# Altium PCB main.PcbDoc (part 15 of 16)
Units mil, origin at the board's own origin, x right, y up, seen from the top; angles counter-clockwise.
Board outline 8394.75 x 5164.44 mil, 7 copper layers (Top Layer 1, Layer 2, Layer 3, Unused, Layer 4_pow, Layer 5_gnd, Bottom 6+gnd), stack 64.043 mil thick; 364 components, 409 nets, 1932 pads, 1061 vias.
Unrouted connection lines stored in the file: 2.
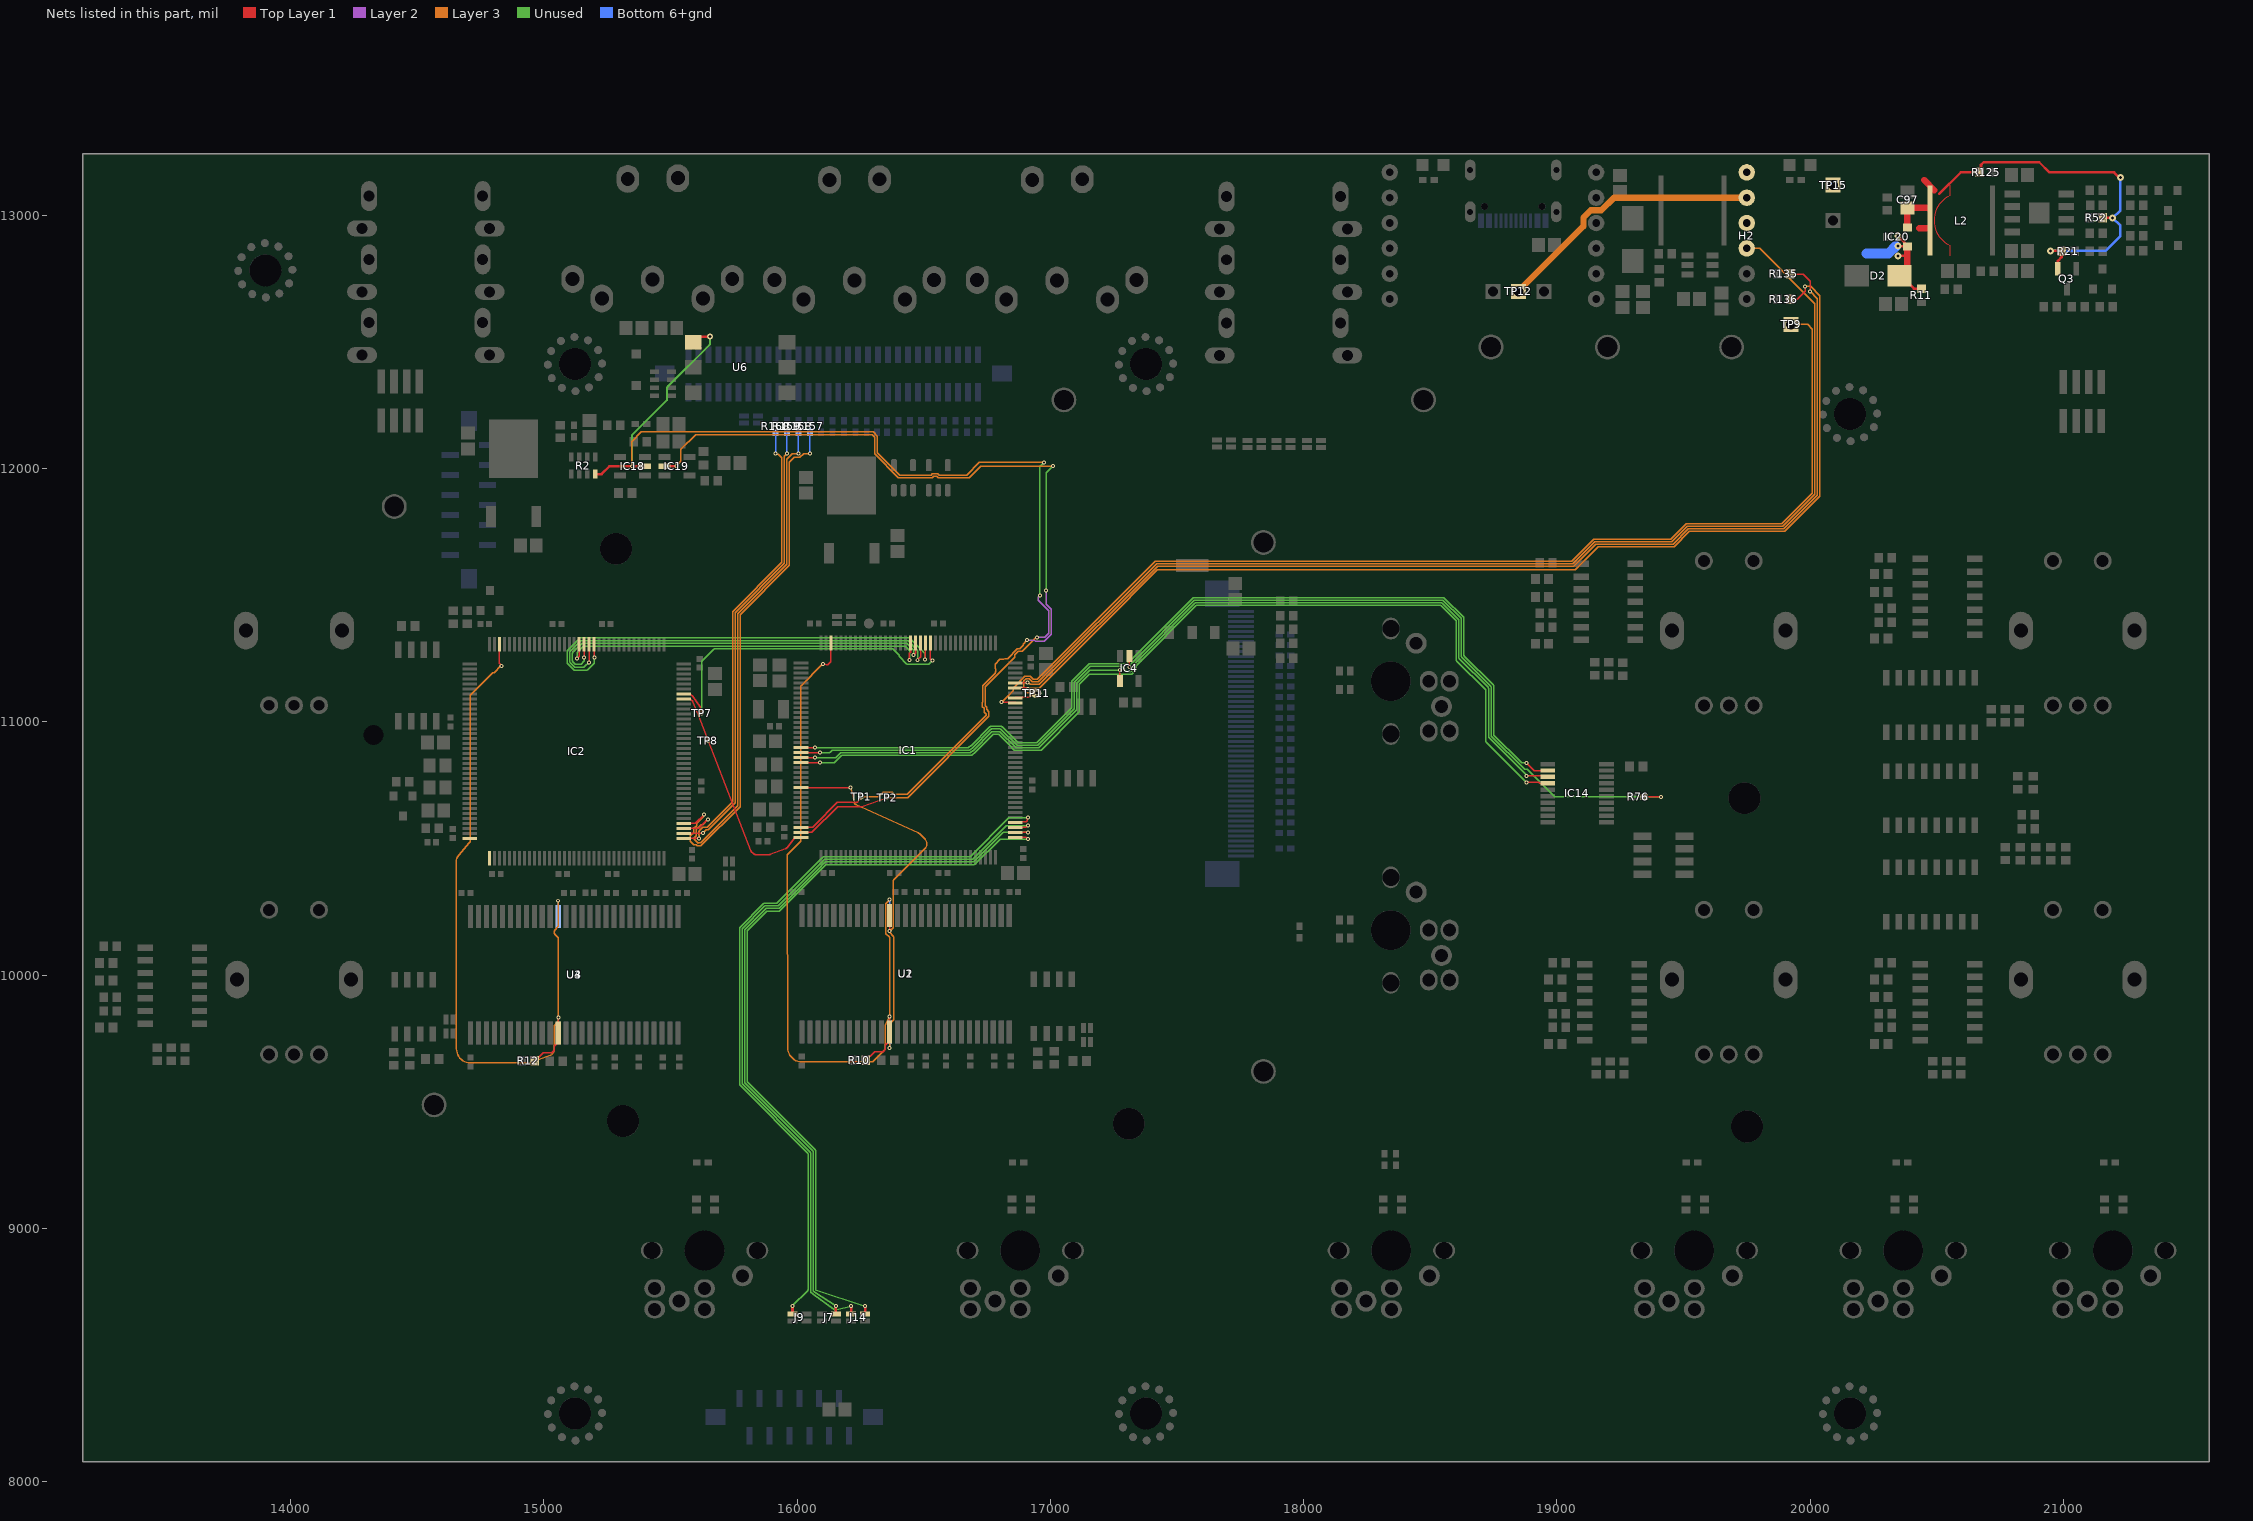
[diagram p18: the nets of this part, all layers, seen from the top]

## Via types
v1: diameter 15.75, hole 7.87, Top Layer 1 to Bottom 6+gnd, tented both sides, 961 vias
v2: diameter 27.56, hole 11.81, Top Layer 1 to Bottom 6+gnd, 45 vias
v3: diameter 23.62/23.62/23.62/23.62/23.62/23.62/23.62 (per signal layer), hole 12, Top Layer 1 to Bottom 6+gnd, tented top, 42 vias
v4: diameter 15.75, hole 7.87, Top Layer 1 to Bottom 6+gnd, 10 vias
v5: diameter 23.62/23.62/23.62/23.62/23.62/23.62/23.62 (per signal layer), hole 12, Top Layer 1 to Bottom 6+gnd, tented bottom, 3 vias

## Nets (pads, with @x,y where several pads share a name; then routed paths per layer and width w, separated by ;. In a path a pad name is that pad's centre, name@x,y a point inside that pad or via, vN(x,y) a via of type N, cw(c..) or ccw(c..) an arc to the next point about the centre after c; other vN are vias at no path point) (continued)
SDNWE_6: IC1.26 U1.16 U2.16 | length 2408.3
  Top Layer 1 w5: IC1.26@16015.39,10741.18 16210.13,10741.2 v1(16211.04,10742.1) ; v1@16365.16,10174.38 U1.16@16365.16,10236.22
  Layer 3 w5: v1(16211.04,10742.1) 16225.31,10683.52 ccw(c16240.24,10687.2) 16233.85,10673.22 16478.29,10561.67 cw(c16467.76,10538.58) 16485.98,10556.24 16505.35,10536.23 ; v1(16364.91,9713.5) 16364.91,9805.11 cw(c16369.91,9805.12) 16366.36,9808.63 16379.58,9821.89 ; v1@16366.14,10168.77 16379.79,10153.23 ; 16380.6,10191.89 16380.6,10374.1 cw(c16385.6,10374.1) 16382.05,10377.62 16505.1,10500.67 ; 16381.03,9825.38 16381.03,10149.97 ; v1@16364.91,10172.06 ccw(c16369.91,10172.06) v1@16366.14,10168.78 ; v1@16364.91,10172.06 ccw(c16369.91,10172.06) v1@16366.14,10168.78 ; v1@16364.91,10172.06 ccw(c16369.91,10172.06) v1@16366.14,10168.78 ; v1@16364.91,10172.06 ccw(c16369.91,10172.06) v1@16366.14,10168.78 ; v1@16364.91,10172.06 ccw(c16369.91,10172.06) v1@16366.14,10168.78 ; v1@16364.91,10172.06 ccw(c16369.91,10172.06) v1@16366.14,10168.78 ; v1@16364.91,10172.06 ccw(c16369.91,10172.06) v1@16366.14,10168.78 ; v1@16364.91,10172.06 ccw(c16369.91,10172.06) v1@16366.14,10168.78 ; v1@16364.91,10172.06 ccw(c16369.91,10172.06) v1@16366.14,10168.78 ; v1@16364.91,10172.06 ccw(c16369.91,10172.06) v1@16366.14,10168.78 ; v1@16364.91,10172.06 ccw(c16369.91,10172.06) v1@16366.14,10168.78 ; v1@16364.91,10172.06 ccw(c16369.91,10172.06) v1@16366.14,10168.78 ; v1@16364.91,10172.06 ccw(c16369.91,10172.06) v1@16366.14,10168.78 ; v1@16364.91,10172.06 ccw(c16369.91,10172.06) v1@16366.14,10168.78 ; v1@16364.91,10172.06 ccw(c16369.91,10172.06) v1@16366.14,10168.78 ; v1@16364.91,10172.06 ccw(c16369.91,10172.06) v1@16366.14,10168.78 ; v1@16364.91,10172.06 v1(16364.91,10174.13) 16379.14,10188.41 ; 16379.14,10188.41 ccw(c16375.6,10191.94) 16380.6,10191.85 ; 16379.14,10188.41 ccw(c16375.6,10191.94) 16380.6,10191.85 ; 16379.14,10188.41 ccw(c16375.6,10191.94) 16380.6,10191.85 ; 16379.14,10188.41 ccw(c16375.6,10191.94) 16380.6,10191.85 ; 16379.14,10188.41 ccw(c16375.6,10191.94) 16380.6,10191.85 ; 16379.14,10188.41 ccw(c16375.6,10191.94) 16380.6,10191.85 ; 16379.14,10188.41 ccw(c16375.6,10191.94) 16380.6,10191.85 ; 16379.14,10188.41 ccw(c16375.6,10191.94) 16380.6,10191.85 ; 16379.14,10188.41 ccw(c16375.6,10191.94) 16380.6,10191.85 ; 16379.14,10188.41 ccw(c16375.6,10191.94) 16380.6,10191.85 ; 16379.14,10188.41 ccw(c16375.6,10191.94) 16380.6,10191.85 ; 16379.14,10188.41 ccw(c16375.6,10191.94) 16380.6,10191.85 ; 16379.14,10188.41 ccw(c16375.6,10191.94) 16380.6,10191.85 ; 16379.14,10188.41 ccw(c16375.6,10191.94) 16380.6,10191.85 ; 16379.14,10188.41 ccw(c16375.6,10191.94) 16380.6,10191.85 ; 16379.14,10188.41 ccw(c16375.6,10191.94) 16380.6,10191.85 ; 16379.58,9821.89 ccw(c16376.03,9825.42) 16381.03,9825.33 ; 16379.58,9821.89 ccw(c16376.03,9825.42) 16381.03,9825.33 ; 16379.58,9821.89 ccw(c16376.03,9825.42) 16381.03,9825.33 ; 16379.58,9821.89 ccw(c16376.03,9825.42) 16381.03,9825.33 ; 16379.58,9821.89 ccw(c16376.03,9825.42) 16381.03,9825.33 ; 16379.58,9821.89 ccw(c16376.03,9825.42) 16381.03,9825.33 ; 16379.58,9821.89 ccw(c16376.03,9825.42) 16381.03,9825.33 ; 16379.58,9821.89 ccw(c16376.03,9825.42) 16381.03,9825.33 ; 16379.58,9821.89 ccw(c16376.03,9825.42) 16381.03,9825.33 ; 16379.58,9821.89 ccw(c16376.03,9825.42) 16381.03,9825.33 ; 16379.58,9821.89 ccw(c16376.03,9825.42) 16381.03,9825.33 ; 16379.58,9821.89 ccw(c16376.03,9825.42) 16381.03,9825.33 ; 16379.58,9821.89 ccw(c16376.03,9825.42) 16381.03,9825.33 ; 16379.58,9821.89 ccw(c16376.03,9825.42) 16381.03,9825.33 ; 16379.58,9821.89 ccw(c16376.03,9825.42) 16381.03,9825.33 ; 16379.58,9821.89 ccw(c16376.03,9825.42) 16381.03,9825.33 ; 16379.79,10153.23 cw(c16376.03,10149.93) 16381.03,10150.02 ; 16379.79,10153.23 cw(c16376.03,10149.93) 16381.03,10150.02 ; 16379.79,10153.23 cw(c16376.03,10149.93) 16381.03,10150.02 ; 16379.79,10153.23 cw(c16376.03,10149.93) 16381.03,10150.02 ; 16379.79,10153.23 cw(c16376.03,10149.93) 16381.03,10150.02 ; 16379.79,10153.23 cw(c16376.03,10149.93) 16381.03,10150.02 ; 16379.79,10153.23 cw(c16376.03,10149.93) 16381.03,10150.02 ; 16379.79,10153.23 cw(c16376.03,10149.93) 16381.03,10150.02 ; 16379.79,10153.23 cw(c16376.03,10149.93) 16381.03,10150.02 ; 16379.79,10153.23 cw(c16376.03,10149.93) 16381.03,10150.02 ; 16379.79,10153.23 cw(c16376.03,10149.93) 16381.03,10150.02 ; 16379.79,10153.23 cw(c16376.03,10149.93) 16381.03,10150.02 ; 16379.79,10153.23 cw(c16376.03,10149.93) 16381.03,10150.02 ; 16379.79,10153.23 cw(c16376.03,10149.93) 16381.03,10150.02 ; 16379.79,10153.23 cw(c16376.03,10149.93) 16381.03,10150.02 ; 16379.79,10153.23 cw(c16376.03,10149.93) 16381.03,10150.02 ; 16505.1,10500.67 ccw(c16487.13,10518.58) 16505.35,10536.24 ; 16505.1,10500.67 ccw(c16487.13,10518.58) 16505.35,10536.23 ; 16505.1,10500.67 ccw(c16487.13,10518.58) 16505.35,10536.23 ; 16505.1,10500.67 ccw(c16487.13,10518.58) 16505.35,10536.23 ; 16505.1,10500.67 ccw(c16487.13,10518.58) 16505.35,10536.23 ; 16505.1,10500.67 ccw(c16487.13,10518.58) 16505.35,10536.23 ; 16505.1,10500.67 ccw(c16487.13,10518.58) 16505.35,10536.23 ; 16505.1,10500.67 ccw(c16487.13,10518.58) 16505.35,10536.23 ; 16505.1,10500.67 ccw(c16487.13,10518.58) 16505.35,10536.23 ; 16505.1,10500.67 ccw(c16487.13,10518.58) 16505.35,10536.23 ; 16505.1,10500.67 ccw(c16487.13,10518.58) 16505.35,10536.23 ; 16505.1,10500.67 ccw(c16487.13,10518.58) 16505.35,10536.23 ; 16505.1,10500.67 ccw(c16487.13,10518.58) 16505.35,10536.23 ; 16505.1,10500.67 ccw(c16487.13,10518.58) 16505.35,10536.23 ; 16505.1,10500.67 ccw(c16487.13,10518.58) 16505.35,10536.23 ; 16505.1,10500.67 ccw(c16487.13,10518.58) 16505.35,10536.23
  Bottom 6+gnd w5: v1@16365.16,9713.75 U2.16@16365.16,9775.59
SPI1_MISO: IC1.124 IC2.124 | length 1723.6
  Top Layer 1 w5: v1(15179.1,11234.85) IC2.124@15179.12,11307.38 ; v1(16475.36,11243.72) 16475.36,11245 16487.36,11257 IC1.124@16487.36,11311.57
  Unused w5: v1(15179.1,11234.85) 15160.25,11217.1 cw(c15156.82,11220.74) 15156.82,11215.74 15124.16,11215.74 cw(c15124.16,11220.74) 15120.64,11217.19 15104.6,11233.23 cw(c15108.15,11236.75) 15103.15,11236.75 15103.15,11275.89 cw(c15108.15,11275.89) 15104.6,11279.41 15144.91,11319.72 cw(c15148.43,11316.17) 15148.43,11321.17 16434.78,11321.17 cw(c16434.78,11316.17) 16438.3,11319.72 16474.07,11283.95 cw(c16470.52,11280.43) 16475.52,11280.43 16475.52,11244.94 cw(c16470.52,11244.97) v1(16475.36,11243.72)
SPI1_MOSI: IC1.123 IC2.123 | length 1800.8
  Top Layer 1 w5: IC2.123@15198.81,11307.38 15199.05,11307.15 15199.05,11255.5 v1(15199.28,11255.26) ; v1(16505.24,11247.2) 16506.14,11248.11 16506.14,11310.67 IC1.123@16507.05,11311.57
  Unused w5: v1(15199.28,11255.26) 15199.28,11234.12 cw(c15194.28,11234.12) 15197.83,11230.6 15173.4,11206.17 cw(c15169.88,11209.72) 15169.88,11204.72 15121.04,11204.72 cw(c15121.04,11209.72) 15117.52,11206.17 15094.6,11229.09 cw(c15098.15,11232.61) 15093.15,11232.61 15093.15,11280.03 cw(c15098.15,11280.03) 15094.6,11283.55 15142.84,11331.79 cw(c15146.36,11328.24) 15146.36,11333.24 16439.78,11333.24 cw(c16439.78,11328.24) 16443.3,11331.79 16503.79,11271.31 cw(c16500.24,11267.79) 16505.24,11267.79 v1(16505.24,11247.2)
SPI1_NSS: IC1.125 IC2.125 | length 1599.8
  Top Layer 1 w5: v1(15159.12,11254.61) 15159.28,11254.77 15159.28,11307.23 IC2.125@15159.44,11307.38 ; v1(16460.15,11264.49) 16460.15,11265.71 16467.68,11273.24 IC1.125@16467.68,11311.57
  Unused w5: v1(15159.12,11254.61) 15159.12,11242.68 cw(c15154.12,11242.68) 15157.67,11239.16 15147,11228.49 cw(c15143.48,11232.04) 15143.48,11227.04 15127,11227.04 cw(c15127,11232.04) 15123.48,11228.49 15114.6,11237.37 cw(c15118.15,11240.89) 15113.15,11240.89 15113.15,11271.75 cw(c15118.15,11271.75) 15114.6,11275.27 15149.05,11309.72 cw(c15152.57,11306.17) 15152.57,11311.17 16430.64,11311.17 cw(c16430.64,11306.17) 16434.19,11309.69 16458.25,11285.63 cw(c16454.71,11282.1) 16459.71,11282.22 v1(16460.15,11264.49)
SPI1_SCK: IC1.126 IC2.126 | length 1522.1
  Top Layer 1 w5: v1(15131.48,11250.26) 15139.75,11258.53 IC2.126@15139.75,11307.38 ; v1(16444.2,11244.02) 16443.33,11244.89 16443.33,11270.38 16447.99,11275.04 IC1.126@16447.99,11311.57
  Unused w5: v1(15131.48,11250.26) 15131.48,11272.62 cw(c15136.48,11272.62) 15132.93,11276.14 15154.17,11297.37 cw(c15157.69,11293.82) 15157.69,11298.82 16425.53,11298.82 cw(c16425.53,11293.82) 16429.05,11297.37 16443.33,11283.09 cw(c16439.78,11279.57) 16444.78,11279.57 16444.78,11246.32 cw(c16439.78,11246.35) v1(16444.2,11244.02)
SPI2_ext.MISO_1: IC1.75 J14.2 | length 3110.1
  Top Layer 1 w5: IC1.75@16860.91,10583.7 16903.17,10583.7 16909.87,10590.4 v1(16911.15,10590.4)
  Top Layer 1 w10: J14.2@16213.15,8661.38 v1@16213.15,8693.12
  Unused w5: v1(16212.92,8693.35) 16156.55,8679.63 cw(c16152.92,8694.57) 16143.96,8682.08 16063.58,8739.72 cw(c16078.15,8760.03) 16061.2,8741.66 16054.76,8747.6 cw(c16058.15,8751.27) 16053.15,8751.27 16053.15,9298.46 ccw(c16048.15,9298.46) 16051.7,9301.98 15784.6,9569.09 cw(c15788.15,9572.61) 15783.15,9572.61 15783.15,10182.18 cw(c15788.15,10182.18) 15784.6,10185.7 15871.27,10272.37 cw(c15874.79,10268.82) 15874.79,10273.82 15921.4,10273.82 ccw(c15921.4,10278.82) 15924.92,10275.27 16102.4,10452.5 16105.48,10455.57 cw(c16109.01,10452.03) 16105.52,10455.62 16105.68,10455.77 cw(c16109.15,10452.17) 16109.15,10457.17 16689.43,10457.17 ccw(c16689.43,10462.17) 16692.95,10458.62 16823.28,10588.95 cw(c16826.8,10585.4) 16826.8,10590.4 v1(16911.15,10590.4)
SPI2_ext.MOSI_1: IC1.76 J9.4 | length 3042.9
  Top Layer 1 w5: IC1.76@16860.91,10603.38 16863.03,10605.51 16904.46,10605.51 16909.09,10610.14 16909.09,10620.51 v1(16911.15,10622.57)
  Top Layer 1 w10: J9.4@15981.81,8662.72 v1@15981.81,8694.46
  Unused w5: v1(15981.58,8694.69) 16041.68,8754.82 ccw(c16038.15,8758.36) 16043.15,8758.36 16043.15,9294.32 ccw(c16038.15,9294.32) 16041.7,9297.84 15774.6,9564.94 cw(c15778.15,9568.46) 15773.15,9568.46 15773.15,10186.32 cw(c15778.15,10186.32) 15774.6,10189.84 15867.13,10282.37 cw(c15870.65,10278.82) 15870.65,10283.82 15917.26,10283.82 ccw(c15917.26,10288.82) 15920.78,10285.27 16060.61,10425.1 cw(c16074.72,10410.93) 16060.71,10425.2 16072.38,10436.66 ccw(c16058.36,10450.93) 16072.44,10436.73 16097.06,10461.34 cw(c16111.18,10447.17) 16097.11,10461.4 16101.5,10465.73 cw(c16105.01,10462.17) 16105.01,10467.17 16679.43,10467.17 ccw(c16679.43,10472.17) 16682.95,10468.62 16835.45,10621.12 cw(c16838.97,10617.57) 16838.97,10622.57 v1(16911.15,10622.57)
SPI2_ext.NSS_1: IC1.73 J14.4 | length 3076
  Top Layer 1 w5: IC1.73@16860.91,10544.33 16903.56,10544.33 16910.64,10537.25 v1(16911.15,10537.25)
  Top Layer 1 w10: J14.4@16268.27,8661.38 v1@16268.27,8693.12
  Unused w5: v1(16268.03,8693.35) 16076.59,8755.28 cw(c16078.15,8760.03) 16073.15,8760.03 16073.15,9306.75 ccw(c16068.15,9306.75) 16071.7,9310.27 15804.6,9577.37 cw(c15808.15,9580.89) 15803.15,9580.89 15803.15,10173.89 cw(c15808.15,10173.89) 15804.6,10177.41 15878.63,10251.45 cw(c15882.15,10247.9) 15882.15,10252.9 15928.76,10252.9 ccw(c15928.76,10257.9) 15932.31,10254.37 16113.91,10435.71 cw(c16117.44,10432.17) 16117.44,10437.17 16698.58,10437.17 ccw(c16698.58,10442.17) 16702.1,10438.62 16799.27,10535.8 cw(c16802.79,10532.25) 16802.79,10537.25 v1(16911.15,10537.25)
SPI2_ext.SCK_1: IC1.74 J7.4 | length 3002.8
  Top Layer 1 w5: IC1.74@16860.91,10564.01 16861.06,10563.86 16910.99,10563.86 v1(16911.15,10563.7)
  Top Layer 1 w10: J7.4@16153.15,8662.6 v1@16153.15,8694.34
  Unused w5: v1(16152.92,8694.57) 16070.09,8747.38 cw(c16078.15,8760.03) 16067.57,8749.4 16064.6,8752.37 cw(c16068.15,8755.89) 16063.15,8755.89 16063.15,9302.61 ccw(c16058.15,9302.61) 16061.7,9306.13 15794.6,9573.23 cw(c15798.15,9576.75) 15793.15,9576.75 15793.15,10178.04 cw(c15798.15,10178.04) 15794.6,10181.56 15875.41,10262.37 cw(c15878.93,10258.82) 15878.93,10263.82 15925.54,10263.82 ccw(c15925.54,10268.82) 15929.09,10265.3 16080.73,10416.73 ccw(c16066.65,10430.93) 16080.79,10416.79 16109.46,10445.42 cw(c16113,10441.88) 16109.52,10445.47 16109.82,10445.77 cw(c16113.3,10442.17) 16113.3,10447.17 16694.43,10447.17 ccw(c16694.43,10452.17) 16697.95,10448.62 16811.59,10562.26 cw(c16815.11,10558.7) 16815.11,10563.7 v1(16911.15,10563.7)
SPI2_MISO: IC2.75 R158.1 | length 2042.7
  Top Layer 1 w5: IC2.75@15552.67,10579.51 15612.66,10579.51 v1(15648.15,10615)
  Layer 3 w5: v1(15648.15,10615) 15628.15,10595 15621.08,10595 15613.15,10587.07 15613.15,10586.99 15602.7,10576.55 15602.7,10571.73 15602.13,10571.16 15602.13,10550.74 15593.59,10542.21 15593.59,10536.77 15609.48,10520.88 15612.62,10524.03 15619.07,10524.03 15765,10669.96 15765,11427.57 15960,11622.57 15960,12038.26 15981.74,12060 v1(16005,12060)
  Bottom 6+gnd w5: v1(16005,12060) R158.1@16005,12144.72
SPI2_MOSI: IC2.76 R157.1 | length 2113.2
  Top Layer 1 w5: IC2.76@15552.67,10599.2 15597.35,10599.2 15632.7,10634.55 v1(15632.7,10635.6)
  Layer 3 w5: v1(15632.7,10635.6) 15630.64,10633.54 15630.64,10627.49 15603.15,10600 15603.15,10591.14 15591.52,10579.51 15591.52,10563.37 15578.15,10550 15578.15,10528.08 15591.52,10514.71 15601.51,10514.71 15605.34,10510.88 15620.07,10510.88 15775,10665.82 15775,11423.43 15970,11618.43 15970,12025 15989.63,12044.63 16011.37,12044.63 16026.74,12060 v1(16050,12060)
  Bottom 6+gnd w5: v1(16050,12060) R157.1@16050,12144.72
SPI2_NSS: IC2.73 R160.1 | length 1826.6
  Top Layer 1 w5: IC2.73@15552.67,10540.14 15611.96,10540.14 v1(15612.7,10539.4)
  Layer 3 w5: v1(15612.7,10539.4) 15612.7,10553.71 15612.13,10554.28 15612.13,10567.02 15612.7,10567.59 15612.7,10569.55 15628.15,10585 15645.31,10585 15745,10684.69 15745,11435.86 15940,11630.86 15940,12042.66 15924.7,12057.96 15917.04,12057.96 v1(15915,12060)
  Bottom 6+gnd w5: v1(15915,12060) R160.1@15915,12144.72
SPI2_SCK: IC2.74 R159.1 | length 1801.4
  Top Layer 1 w5: IC2.74@15552.67,10559.83 15553.08,10560.24 15627.09,10560.24 v1(15627.5,10560.65)
  Layer 3 w5: v1(15627.5,10560.65) 15641.85,10575 15649.45,10575 15755,10680.55 15755,11431.72 15950,11626.72 15950,12050 v1(15960,12060)
  Bottom 6+gnd w5: v1(15960,12060) R159.1@15960,12144.72
SPI5_MISO: IC1.20 IC4.4 | length 1558.8
  Top Layer 1 w5: IC1.20@16015.47,10859.22 v1@16070.35,10859.22 ; IC4.4@17274.13,11162.52 17274.13,11203.36 v1(17275.36,11204.59)
  Unused w5: v1(16070.42,10859.14) 16150.96,10859.14 ccw(c16150.96,10864.14) 16154.48,10860.59 16170.96,10877.07 cw(c16174.48,10873.51) 16174.48,10878.51 16683.11,10878.51 ccw(c16683.11,10883.51) 16686.19,10879.58 16694.51,10886.09 ccw(c16691.43,10890.03) 16694.95,10886.48 16769.37,10960.89 cw(c16772.89,10957.34) 16772.89,10962.34 16797.33,10962.34 cw(c16797.33,10957.34) 16800.85,10960.89 16862.43,10899.32 ccw(c16865.96,10902.86) 16865.96,10897.86 16953.41,10897.86 ccw(c16953.41,10902.86) 16956.93,10899.31 17102.99,11045.37 ccw(c17099.44,11048.89) 17104.44,11048.89 17104.44,11151.44 cw(c17109.44,11151.44) 17105.89,11154.96 17154.06,11203.14 cw(c17157.58,11199.59) 17157.58,11204.59 v1(17275.36,11204.59)
SPI5_MOSI: IC1.21 IC14.4 | length 3831.5
  Top Layer 1 w5: IC1.21@16015.39,10839.61 v1(16089.53,10839.64) ; v1(18880,10761.57) 18928.42,10761.57 18932.79,10757.2 IC14.4@18964.33,10757.2
  Unused w5: v1(16089.53,10839.64) 16145.61,10839.64 ccw(c16145.61,10844.64) 16149.13,10841.09 16175.1,10867.07 cw(c16178.62,10863.51) 16178.62,10868.51 16687.16,10868.51 ccw(c16687.16,10873.51) 16690.22,10869.56 16691.53,10870.58 ccw(c16688.47,10874.53) 16691.67,10870.69 16701.3,10878.71 ccw(c16698.09,10882.55) 16701.61,10879 16773.53,10950.91 cw(c16777.03,10947.34) 16777.03,10952.34 16792.48,10952.34 cw(c16792.48,10947.34) 16795.98,10950.91 16838.09,10909.52 cw(c16827.58,10898.82) 16838.2,10909.41 16858.29,10889.32 ccw(c16861.81,10892.86) 16861.81,10887.86 16960.72,10887.86 ccw(c16960.72,10892.86) 16964.24,10889.31 17112.99,11038.06 ccw(c17109.44,11041.58) 17114.44,11041.58 17114.44,11147.3 cw(c17119.44,11147.3) 17115.89,11150.82 17152.7,11187.64 cw(c17156.22,11184.09) 17156.22,11189.09 17320.43,11189.09 ccw(c17320.43,11194.09) 17323.95,11190.54 17337.49,11204.08 ccw(c17333.94,11207.6) 17338.94,11207.6 17338.94,11220.97 cw(c17343.94,11220.97) 17340.39,11224.49 17574.65,11458.75 cw(c17578.17,11455.2) 17578.17,11460.2 18539.69,11460.2 cw(c18539.69,11455.2) 18543.21,11458.75 18601.7,11400.27 cw(c18598.15,11396.75) 18603.15,11396.75 18603.15,11243.92 ccw(c18608.15,11243.92) 18604.6,11240.4 18718.55,11126.45 cw(c18715,11122.93) 18720,11122.93 18720,10923.65 ccw(c18725,10923.65) 18721.45,10920.13 v1(18880,10761.57)
SPI5_NSS: IC1.18 IC14.2 | length 3791
  Top Layer 1 w5: IC1.18@16015.39,10898.66 16015.47,10898.59 16070.35,10898.59 v1(16070.42,10898.51) ; v1(18880,10838.82) 18910.43,10808.38 IC14.2@18964.33,10808.38
  Unused w5: v1(16070.42,10898.51) 16674.82,10898.51 ccw(c16674.82,10903.51) 16677.91,10899.58 16686.24,10906.1 ccw(c16683.15,10910.03) 16686.67,10906.48 16761.08,10980.89 cw(c16764.6,10977.34) 16764.6,10982.34 16805.62,10982.34 cw(c16805.62,10977.34) 16809.14,10980.89 16870.72,10919.32 ccw(c16874.24,10922.86) 16874.24,10917.86 16945.12,10917.86 ccw(c16945.12,10922.86) 16948.64,10919.31 17082.99,11053.66 ccw(c17079.44,11057.18) 17084.44,11057.18 17084.44,11159.73 cw(c17089.44,11159.73) 17085.89,11163.25 17151.15,11228.52 cw(c17154.67,11224.96) 17154.67,11229.96 17301.37,11229.96 ccw(c17301.37,11234.96) 17304.89,11231.41 17562.23,11488.75 cw(c17565.75,11485.2) 17565.75,11490.2 18552.12,11490.2 cw(c18552.12,11485.2) 18555.64,11488.75 18631.7,11412.69 cw(c18628.15,11409.17) 18633.15,11409.17 18633.15,11263.92 ccw(c18638.15,11263.92) 18634.6,11260.4 18748.55,11146.45 cw(c18745,11142.93) 18750,11142.93 18750,10950.89 ccw(c18755,10950.89) 18751.45,10947.37 18858.55,10840.27 ccw(c18862.07,10843.82) 18862.07,10838.82 v1(18880,10838.82)
SPI5_SCK: IC1.19 IC14.3 | length 3821.1
  Top Layer 1 w5: IC1.19@16015.39,10878.98 v1(16089.53,10879.01) ; v1(18880,10787.32) 18959.8,10787.32 IC14.3@18964.33,10782.79
  Unused w5: v1(16089.53,10879.01) 16126.97,10879.01 ccw(c16126.97,10884.01) 16130.49,10880.46 16137.1,10887.07 cw(c16140.62,10883.51) 16140.62,10888.51 16678.87,10888.51 ccw(c16678.87,10893.51) 16681.93,10889.56 16683.24,10890.57 ccw(c16680.18,10894.53) 16683.38,10890.69 16693.04,10898.74 ccw(c16689.85,10902.59) 16693.37,10899.04 16765.24,10970.91 cw(c16768.75,10967.34) 16768.75,10972.34 16801.48,10972.34 cw(c16801.48,10967.34) 16805,10970.89 16866.57,10909.32 ccw(c16870.1,10912.86) 16870.1,10907.86 16949.27,10907.86 ccw(c16949.27,10912.86) 16952.79,10909.31 17092.99,11049.51 ccw(c17089.44,11053.03) 17094.44,11053.03 17094.44,11155.59 cw(c17099.44,11155.59) 17095.89,11159.11 17155.29,11218.52 cw(c17158.81,11214.96) 17158.81,11219.96 17279.66,11219.96 cw(c17279.66,11214.96) 17283.18,11218.52 17301.16,11200.54 ccw(c17304.68,11204.09) 17304.68,11199.09 17316.29,11199.09 ccw(c17316.29,11204.09) 17319.81,11200.54 17327.49,11208.22 ccw(c17323.94,11211.74) 17328.94,11211.74 17328.94,11225.12 cw(c17333.94,11225.12) 17330.39,11228.64 17570.51,11468.75 cw(c17574.03,11465.2) 17574.03,11470.2 18543.84,11470.2 cw(c18543.84,11465.2) 18547.36,11468.75 18611.7,11404.41 cw(c18608.15,11400.89) 18613.15,11400.89 18613.15,11253.92 ccw(c18618.15,11253.92) 18614.6,11250.4 18728.55,11136.45 cw(c18725,11132.93) 18730,11132.93 18730,10942.61 ccw(c18735,10942.61) 18731.45,10939.09 18878.55,10791.98 cw(c18875,10788.46) 18880,10788.46 v1(18880,10787.32)
UART1_RX: IC1.122 IC2.102 TP7.1 | length 1357.9
  Top Layer 1 w5: IC2.102@15552.67,11111.01 15579.2,11107.6 15585.65,11103.6 cw(c15581.7,11097.23) 15587.8,11101.6 15615.64,11062.78 cw(c15603.15,11053.82) 15618.18,11057.03 v1(15623.15,11033.82) ; IC1.122@16526.73,11311.57 16526.73,11249.86 v1(16534.45,11242.15)
  Unused w5: v1(15623.15,11033.82) 15623.15,11238.6 cw(c15628.15,11238.6) 15624.6,11242.12 15638.67,11256.19 cw(c15642.19,11252.64) 15640.02,11257.14 15642.07,11258.13 ccw(c15639.89,11262.63) 15643.41,11259.08 15671.7,11287.37 cw(c15675.22,11283.82) 15675.22,11288.82 16376.08,11288.82 cw(c16376.08,11283.82) 16379.6,11287.37 16401.7,11265.27 cw(c16398.15,11261.75) 16403.15,11261.75 16403.15,11260.47 ccw(c16408.15,11260.47) 16404.6,11256.95 16431.76,11229.79 ccw(c16435.28,11233.34) 16435.28,11228.34 16518.57,11228.34 ccw(c16518.57,11233.34) 16522.09,11229.79 v1(16534.45,11242.15)
UART1_TX: IC1.36 IC2.101 TP8.1 | length 899.1
  Top Layer 1 w5: IC2.101@15552.67,11091.32 15579.2,11087.92 15585.65,11083.92 cw(c15581.7,11077.54) 15588.7,11080.25 15608.81,11028.27 15648.85,10925.27 15817.44,10491.58 ccw(c15826.76,10495.21) 15819.69,10488.14 15828.41,10479.41 ccw(c15835.48,10486.49) 15835.48,10476.49 15890.82,10476.49 ccw(c15890.82,10486.49) 15894.3,10477.11 15953.72,10499.18 ccw(c15948.37,10513.6) 15960.55,10504.21 15988.86,10540.93 IC1.36@16015.39,10544.33
  other v1: 15648.15,10925
UART2_RX: IC2.37
UART2_TX: IC2.36
UART4_RX: IC1.35 IC18.2 R2.4 TP2.1 U6.4 | length 4884.9
  Top Layer 1 w5: U6.4@15589.96,12500 U6.4@15611.81,12521.85 ; IC1.35@16015.39,10564.01 16058.45,10564.01 16160.16,10665.72 16252.41,10665.72 ; 16254.38,10666.12 v1(16355.24,10701.2)
  Top Layer 1 w10: R2.4@15203.45,11978.65 15227.74,11978.65 15258.8,12009.71 v1(15347.23,12009.71) IC18.2@15399.63,12009.71 ; U6.4@15611.81,12521.85 v3(15656.85,12521.85)
  Layer 2 w5: v1(16948.15,11333.82) 16976.97,11333.82 16993.15,11350 16993.15,11440 16953.15,11480 16953.15,11491.7 16958.9,11497.44 v1(16958.9,11500)
  Unused w5: v1(16958.9,11500) 16958.9,12006.83 cw(c16963.9,12006.83) 16960.35,12010.35 v1(16975,12025)
  Unused w8: v1(15347.23,12009.71) 15347.23,12128.91 cw(c15355.23,12128.91) 15349.56,12134.56 15484.91,12269.91 ccw(c15479.25,12275.56) 15487.25,12275.56 15487.25,12318.93 cw(c15495.25,12318.93) 15489.58,12324.58 15654.51,12489.51 ccw(c15648.85,12495.16) 15656.85,12495.16 v3(15656.85,12521.85)
  Layer 3 w5: v1(15347.23,12009.71) 15347.23,12107.11 15385.12,12145 16300,12145 16316.9,12128.1 16316.9,12063.1 16405,11975 16529.12,11975 16534.49,11980.37 16555.51,11980.37 16560.88,11975 16670,11975 16720,12025 v1(16975,12025) ; v1(16355.24,10701.2) 16436.39,10701.2 16756.94,11021.75 16756.94,11040.89 16748.49,11049.33 16748.49,11057.98 16743.15,11063.32 16743.15,11138.82 16859.86,11255.53 16859.86,11264.57 16874.11,11278.82 16889.47,11278.82 16940.44,11329.79 16941.21,11329.79 16945.24,11333.82 v1(16948.15,11333.82)
UART4_TX: IC1.34 IC19.2 TP1.1 | length 3856.8
  Top Layer 1 w5: IC1.34@16015.39,10583.7 16060.99,10583.7 16070.12,10592.83 16159.49,10682.2 16232.89,10682.2 ccw(c16232.89,10687.2) 16236.74,10684.01 TP1.1@16252.63,10703.14
  Top Layer 1 w10: IC19.2@15476.2,12009.71 15522.67,12009.71 v1(15523.34,12010.38)
  Layer 2 w5: v1(16907.44,11323.07) 16937.15,11323.07 16941.78,11318.44 16975.74,11318.44 17003.15,11345.86 17003.15,11444.14 16983.15,11464.14 v1(16983.15,11520)
  Unused w5: v1(16983.15,11520) 16983.15,11981.08 cw(c16988.15,11981.08) 16984.6,11984.6 v1(17010,12010)
  Layer 3 w5: v1(15523.34,12010.38) 15541.58,12028.61 15541.58,12076.58 15600,12135 16295.86,12135 16306.9,12123.96 16306.9,12058.1 16400,11965 16533.26,11965 16538.63,11970.37 16551.37,11970.37 16556.74,11965 16680,11965 16725,12010 16968.26,12010 16968.63,12009.63 16981.37,12009.63 16981.74,12010 v1(17010,12010) ; v3(16253.24,10705.2) 16322.7,10705.2 16339.5,10722.01 16375.27,10722.01 16383.46,10713.82 16434.87,10713.82 16746.94,11025.89 16746.94,11030.03 16738.49,11038.48 16738.49,11053.84 16731.91,11060.41 16731.91,11077.58 16733.15,11078.82 16733.15,11142.96 16783.15,11192.96 16783.15,11197.08 16783.52,11197.45 16783.52,11210.19 16783.15,11210.56 16783.15,11228.89 16800.97,11246.7 16815.14,11246.7 16818.92,11250.48 16831.49,11250.48 16869.82,11288.82 16879.01,11288.82 16892.2,11302.01 16892.2,11307.83 v1(16907.44,11323.07)
UDQM1_7: IC2.142 R12.2 U3.39 U4.39 | length 3013
  Top Layer 1 w5: IC2.142@14824.79,11307.32 14824.79,11232.6 14833.22,11224.17 v1(14833.22,11221.26) ; R12.2@14963.67,9659.63 R12.2@14963.73,9661.6 14965.64,9661.6 14997.98,9693.94 15031.59,9693.94 15040.6,9702.94 15040.6,9720.14 15056.86,9736.4 15056.86,9771.4 v1@15056.86,9833.24
  Layer 3 w5: 14709.85,11090.76 14709.85,10533.22 cw(c14704.85,10533.23) 14709.84,10532.85 14709.78,10532.11 cw(c14694.82,10533.22) 14706.2,10523.44 14664.2,10474.26 ccw(c14698.42,10445.04) 14654.48,10454.74 14653.98,10452.49 ccw(c14678.4,10447.09) 14653.4,10447.16 14653.4,10444.98 14653.7,10444.62 cw(c14649.9,10441.38) 14654.9,10441.41 14654.9,9709.35 ccw(c14710.27,9709.43) 14710.23,9654.05 14741.53,9653.94 ccw(c14741.61,9673.94) 14741.61,9653.94 14867.75,9653.94 ; 14709.85,11090.81 14709.85,11105.49 14798.75,11194.39 14803.45,11194.39 14830.31,11221.26 v1(14833.22,11221.26) ; 14867.78,9653.94 14930.75,9654.1 ccw(c14930.63,9709.47) 14947.96,9656.88 14976.31,9666.21 ccw(c14962.12,9709.31) 14977.27,9666.54 15024.54,9683.27 ccw(c15016.55,9705.96) 15040.6,9705.74 15040.6,9801.12 15057.1,9817.63 v1(15057.1,9833.49) 15057.1,10145.68 ccw(c15052.1,10145.59) 15055.65,10149.12 15045.72,10159.1 cw(c15056.61,10169.94) 15045.09,10180.12 15055.85,10192.29 ccw(c15052.1,10195.6) 15057.1,10195.51 ; v1(15056.61,10294.12) 15057.1,10293.63 15057.1,10195.56
  Bottom 6+gnd w5: U4.39@15056.86,10232.03 v1@15056.86,10293.87
UDQM_6: IC1.142 R10.2 U1.39 U2.39 | length 4556.5
  Top Layer 1 w5: v1(16101.39,11229.33) 16101.89,11228.82 16111.81,11228.82 16114.31,11226.32 16121.74,11226.32 16133.03,11237.61 16133.03,11311.46 IC1.142@16133.09,11311.51 ; R10.2@16271.97,9663.82 16271.97,9665.79 16286.2,9680.02 16288.17,9680.02 16306.28,9698.13 16339.89,9698.13 16348.9,9707.13 16348.9,9724.33 16365.16,9740.59 U1.39@16365.16,9775.59 v1@16365.16,9837.43
  Layer 3 w5: 15961.7,10450.26 15963.2,9713.53 ; 15961.7,10450.28 15961.7,10470.68 cw(c15976.7,10470.68) 15961.7,10470.79 15961.72,10474.89 ; v1(16101.39,11229.33) 16015.26,11141.48 ccw(c16018.83,11137.98) 16013.83,11137.98 16013.83,10529.03 15963.16,10478.36 ; 16288.79,9657.93 16284.64,9657.93 16049.75,9658.13 16018.36,9658.24 ; 16288.84,9657.93 16297.67,9657.96 ; v1(16364.91,10298.31) 16349.54,10282.93 16349.54,10168.26 ; 16365.4,10148.25 v1(16365.4,9837.68) cw(c16360.4,9837.68) 16364.85,9835.38 16349.45,9805.53 ccw(c16353.9,9803.24) 16348.9,9803.24 16348.9,9707.13 16301.16,9659.4 ; 15961.72,10474.89 cw(c15966.72,10474.85) 15963.14,10478.34 ; 15961.72,10474.89 cw(c15966.72,10474.85) 15963.14,10478.34 ; 15961.72,10474.89 cw(c15966.72,10474.85) 15963.14,10478.34 ; 15961.72,10474.89 cw(c15966.72,10474.85) 15963.14,10478.34 ; 15961.72,10474.89 cw(c15966.72,10474.85) 15963.14,10478.34 ; 15961.72,10474.89 cw(c15966.72,10474.85) 15963.14,10478.34 ; 15961.72,10474.89 cw(c15966.72,10474.85) 15963.14,10478.34 ; 15961.72,10474.89 cw(c15966.72,10474.85) 15963.14,10478.34 ; 15961.72,10474.89 cw(c15966.72,10474.85) 15963.14,10478.34 ; 15961.72,10474.89 cw(c15966.72,10474.85) 15963.14,10478.34 ; 15961.72,10474.89 cw(c15966.72,10474.85) 15963.14,10478.34 ; 15961.72,10474.89 cw(c15966.72,10474.85) 15963.14,10478.34 ; 15961.72,10474.89 cw(c15966.72,10474.85) 15963.14,10478.34 ; 15961.72,10474.89 cw(c15966.72,10474.85) 15963.14,10478.34 ; 15961.72,10474.89 cw(c15966.72,10474.85) 15963.14,10478.34 ; 15961.72,10474.89 cw(c15966.72,10474.85) 15963.14,10478.34 ; 15963.2,9713.53 ccw(c16018.57,9713.62) 16018.36,9658.24 ; 15963.2,9713.53 ccw(c16018.57,9713.62) 16018.36,9658.24 ; 15963.2,9713.53 ccw(c16018.57,9713.62) 16018.36,9658.24 ; 15963.2,9713.53 ccw(c16018.57,9713.62) 16018.36,9658.24 ; 15963.2,9713.53 ccw(c16018.57,9713.62) 16018.36,9658.24 ; 15963.2,9713.53 ccw(c16018.57,9713.62) 16018.36,9658.24 ; 15963.2,9713.53 ccw(c16018.57,9713.62) 16018.36,9658.24 ; 15963.2,9713.53 ccw(c16018.57,9713.62) 16018.36,9658.24 ; 15963.2,9713.53 ccw(c16018.57,9713.62) 16018.36,9658.24 ; 15963.2,9713.53 ccw(c16018.57,9713.62) 16018.36,9658.24 ; 15963.2,9713.53 ccw(c16018.57,9713.62) 16018.36,9658.24 ; 15963.2,9713.53 ccw(c16018.57,9713.62) 16018.36,9658.24 ; 15963.2,9713.53 ccw(c16018.57,9713.62) 16018.36,9658.24 ; 15963.2,9713.53 ccw(c16018.57,9713.62) 16018.36,9658.24 ; 15963.2,9713.53 ccw(c16018.57,9713.62) 16018.36,9658.24 ; 15963.2,9713.53 ccw(c16018.57,9713.62) 16018.36,9658.24 ; 16297.67,9657.96 ccw(c16297.65,9662.96) 16301.14,9659.38 ; 16297.67,9657.96 ccw(c16297.65,9662.96) 16301.14,9659.38 ; 16297.67,9657.96 ccw(c16297.65,9662.96) 16301.14,9659.38 ; 16297.67,9657.96 ccw(c16297.65,9662.96) 16301.14,9659.38 ; 16297.67,9657.96 ccw(c16297.65,9662.96) 16301.14,9659.38 ; 16297.67,9657.96 ccw(c16297.65,9662.96) 16301.14,9659.38 ; 16297.67,9657.96 ccw(c16297.65,9662.96) 16301.14,9659.38 ; 16297.67,9657.96 ccw(c16297.65,9662.96) 16301.14,9659.38 ; 16297.67,9657.96 ccw(c16297.65,9662.96) 16301.14,9659.38 ; 16297.67,9657.96 ccw(c16297.65,9662.96) 16301.14,9659.38 ; 16297.67,9657.96 ccw(c16297.65,9662.96) 16301.14,9659.38 ; 16297.67,9657.96 ccw(c16297.65,9662.96) 16301.14,9659.38 ; 16297.67,9657.96 ccw(c16297.65,9662.96) 16301.14,9659.38 ; 16297.67,9657.96 ccw(c16297.65,9662.96) 16301.14,9659.38 ; 16297.67,9657.96 ccw(c16297.65,9662.96) 16301.14,9659.38 ; 16297.67,9657.96 ccw(c16297.65,9662.96) 16301.14,9659.38 ; 16349.54,10168.26 ccw(c16354.54,10168.26) 16351.01,10164.72 ; 16349.54,10168.26 ccw(c16354.54,10168.26) 16351.01,10164.72 ; 16349.54,10168.26 ccw(c16354.54,10168.26) 16351.01,10164.72 ; 16349.54,10168.26 ccw(c16354.54,10168.26) 16351.01,10164.72 ; 16349.54,10168.26 ccw(c16354.54,10168.26) 16351.01,10164.72 ; 16349.54,10168.26 ccw(c16354.54,10168.26) 16351.01,10164.72 ; 16349.54,10168.26 ccw(c16354.54,10168.26) 16351.01,10164.72 ; 16349.54,10168.26 ccw(c16354.54,10168.26) 16351.01,10164.72 ; 16349.54,10168.26 ccw(c16354.54,10168.26) 16351.01,10164.72 ; 16349.54,10168.26 ccw(c16354.54,10168.26) 16351.01,10164.72 ; 16349.54,10168.26 ccw(c16354.54,10168.26) 16351.01,10164.72 ; 16349.54,10168.26 ccw(c16354.54,10168.26) 16351.01,10164.72 ; 16349.54,10168.26 ccw(c16354.54,10168.26) 16351.01,10164.72 ; 16349.54,10168.26 ccw(c16354.54,10168.26) 16351.01,10164.72 ; 16349.54,10168.26 ccw(c16354.54,10168.26) 16351.01,10164.72 ; 16349.54,10168.26 ccw(c16354.54,10168.26) 16351.01,10164.71 ; 16351.01,10164.71 16363.94,10151.74 ; 16363.94,10151.74 cw(c16360.4,10148.21) 16365.4,10148.3 ; 16363.94,10151.74 cw(c16360.4,10148.21) 16365.4,10148.3 ; 16363.94,10151.74 cw(c16360.4,10148.21) 16365.4,10148.3 ; 16363.94,10151.74 cw(c16360.4,10148.21) 16365.4,10148.3 ; 16363.94,10151.74 cw(c16360.4,10148.21) 16365.4,10148.3 ; 16363.94,10151.74 cw(c16360.4,10148.21) 16365.4,10148.3 ; 16363.94,10151.74 cw(c16360.4,10148.21) 16365.4,10148.3 ; 16363.94,10151.74 cw(c16360.4,10148.21) 16365.4,10148.3 ; 16363.94,10151.74 cw(c16360.4,10148.21) 16365.4,10148.3 ; 16363.94,10151.74 cw(c16360.4,10148.21) 16365.4,10148.3 ; 16363.94,10151.74 cw(c16360.4,10148.21) 16365.4,10148.3 ; 16363.94,10151.74 cw(c16360.4,10148.21) 16365.4,10148.3 ; 16363.94,10151.74 cw(c16360.4,10148.21) 16365.4,10148.3 ; 16363.94,10151.74 cw(c16360.4,10148.21) 16365.4,10148.3 ; 16363.94,10151.74 cw(c16360.4,10148.21) 16365.4,10148.3 ; 16363.94,10151.74 cw(c16360.4,10148.21) 16365.4,10148.3
  Bottom 6+gnd w5: U2.39@16365.16,10236.22 v1@16365.16,10298.06
UI_MISO: IC4.2 R76.1 | length 2844.9
  Top Layer 1 w5: IC4.2@17311.54,11260.94 17311.54,11217.28 v1(17312.63,11216.18) ; R76.1@19345.28,10703.82 19410.59,10703.82 v1(19411.14,10704.37)
  Unused w5: v1(17312.63,11216.18) 17312.63,11217.02 cw(c17317.63,11217.02) 17313.19,11219.31 17319.5,11231.55 cw(c17323.94,11229.26) 17320.39,11232.78 17566.37,11478.75 cw(c17569.89,11475.2) 17569.89,11480.2 18547.98,11480.2 cw(c18547.98,11475.2) 18551.5,11478.75 18621.7,11408.55 cw(c18618.15,11405.03) 18623.15,11405.03 18623.15,11258.92 ccw(c18628.15,11258.92) 18624.6,11255.4 18738.55,11141.45 cw(c18735,11137.93) 18740,11137.93 18740,10946.75 ccw(c18745,10946.75) 18741.45,10943.23 18870.16,10814.52 ccw(c18873.68,10818.07) 18873.68,10813.07 18881.03,10813.07 cw(c18881.03,10808.07) 18884.57,10811.61 18990.36,10705.82 ccw(c18993.87,10709.37) 18993.87,10704.37 v1(19411.14,10704.37)
USB_FS_DM: IC1.103 R136.1 | length 4452.6
  Top Layer 1 w5: IC1.103@16860.91,11134.88 16904.81,11134.88 16909.65,11130.04 v1(16911.3,11130.04) ; R136.1@19921.18,12670 19950,12670 19980,12700 v1(19980,12720)
  Layer 3 w5: v1(16911.3,11130.04) 16913.35,11132.1 16918.33,11132.1 16919.6,11133.37 16955.99,11133.37 17208.15,11385.53 17208.15,11385.83 17422.78,11600.46 19072.07,11600.46 19163.96,11692.35 19462.68,11692.35 19522.77,11752.45 19900.31,11752.45 20038.78,11890.91 20038.78,12682.96 20001.74,12720 v1(19980,12720)
USB_FS_DP: IC1.104 R135.1 | length 4428.5
  Top Layer 1 w5: IC1.104@16860.91,11154.57 16861.51,11155.17 16909.69,11155.17 v1(16910.29,11155.77) ; R135.1@19921.18,12770 19923.67,12767.52 19972.48,12767.52 20000,12740 v1(20000,12700)
  Layer 3 w5: v1(16910.29,11155.77) 16913.2,11155.77 16920.21,11148.76 16956.94,11148.76 17423.28,11615.1 19066.28,11615.1 19153.53,11702.35 19458.54,11702.35 19518.98,11762.8 19896.52,11762.8 20028.78,11895.05 20028.78,12671.22 v1(20000,12700)
USB_FS_SOF: IC1.100 TP9.1 | length 4353.2
  Top Layer 1 w5: v1(16807.61,11078.28) 16808.83,11077.05 16859.68,11077.05 IC1.100@16860.91,11075.83
  Layer 3 w5: v1(16807.61,11078.28) 16852.49,11123.16 16852.49,11133.86 16899.78,11181.15 16920.8,11181.15 16933.19,11168.76 16948.09,11168.76 17414.43,11635.1 19057.99,11635.1 19145.25,11722.35 19450.25,11722.35 19510.7,11782.8 19888.24,11782.8 20008.78,11903.34 20008.78,12551.22 19990,12570 TP9.1@19925,12570
USB_FS_VBUS: H2.4 IC1.101 TP11.1 | length 4744
  Top Layer 1 w5: IC1.101@16860.91,11095.51 16862.03,11096.64 16916.31,11096.64 16933.1,11113.43 16944.38,11113.43 v5(16944.61,11113.66) ; TP11.1@16939.61,11118.66 TP11.1@16939.61,11128.66
  Layer 3 w5: v5(16944.61,11113.66) 16943.6,11114.67 16904.93,11114.67 16894.92,11124.68 16894.92,11162.14 16903.92,11171.15 16916.66,11171.15 16929.04,11158.76 16952.8,11158.76 17419.14,11625.1 19062.14,11625.1 19149.39,11712.35 19454.39,11712.35 19514.84,11772.8 19892.38,11772.8 20018.78,11899.19 20018.78,12651.22 19800,12870 H2.4@19749.81,12870
V_BAT: C97.2 IC20.2 L2.2 Q3.2 R21.2 R52.2 R125.2 TP15.1 | length 1766.8
  Top Layer 1 w10: 20509.61,13084.96 20594.65,13170 R125.2@20669.06,13170 20674.65,13175.59 20674.65,13200 20684.65,13210 20904.65,13210 20944.65,13170 21199.89,13170 21219.89,13150 v2(21224.65,13150) ; v2(20949.65,12860) 20992.2,12860 R21.2@20992.83,12859.37 20992.83,12835.67 20978.02,12820.85 Q3.2@20978.02,12789.37 ; R52.2@21155.83,12990 v2(21194.65,12990)
  Top Layer 1 w25: IC20.2@20384.02,12952.4 C97.2@20384.02,13029.37 ; C97.2@20384.65,13030 20463.96,13030 L2.2@20466.61,13027.34 ; 20430.63,12950 20460.63,12950 ; 20450.63,13140 20490.63,13100
  Bottom 6+gnd w10: v2(20949.65,12860) 21166.48,12860 21224.65,12918.16 21224.65,12960 v2(21194.65,12990) 21224.65,13020 v2(21224.65,13150)
V_USB: D2.1 H2.1 H2.2 H2.3 IC20.1 R11.2 TP12.1 | length 1577.1
  Top Layer 1 w10: v2(20347.5,12840) 20381.96,12840 20383.44,12838.51 ; v2(20347.5,12918.02) 20373.95,12891.57 20373.95,12887.66 IC20.1@20383.85,12877.76 ; v2(20347.75,12878.56) 20347.96,12878.35 20382.83,12878.35 20383.6,12877.57 20383.79,12877.76 IC20.1@20383.85,12877.76 ; D2.1@20352.65,12762.1 20353.62,12762.1 20358.55,12762.1 20409.47,12711.18 R11.2@20439.65,12711.18 ; IC20.1@20384.02,12877.6 IC20.1@20383.85,12877.76
  Top Layer 1 w25: D2.1@20353.62,12762.1 20383.44,12791.92 20383.44,12838.51 IC20.1@20383.44,12877.03 ; IC20.1@20383.47,12878.09 IC20.1@20383.79,12877.76
  Layer 3 w25: TP12.1@18847.89,12700.05 19104.81,12956.98 19104.81,12990.7 19134.1,13019.99 19175.52,13019.99 19225.53,13070 H2.2@19749.81,13070
  Bottom 6+gnd w10: v2@20339.65,12880 20341.09,12878.56 v2(20347.75,12878.56)
  Bottom 6+gnd w40: 20223.08,12850 20309.65,12850 v2@20339.65,12880
pads on no net: ENC1.MT1 ENC1.MT2 ENC2.MT1 ENC2.MT2 ENC3.MT1 ENC3.MT2 ENC4.MT1 ENC4.MT2 ENC5.MT1 ENC5.MT2 H3.4 H3.5 H3.6 H3.7 H3.17 H3.18 H3.35 H3.36 H3.37 H3.38 H3.39 H3.40 H3.MP1 IC1.6 IC1.7 IC1.95 IC1.117 IC1.143 IC2.6 IC2.9 IC2.26 IC2.27 IC2.28 IC2.35 IC2.40 IC2.41 IC2.42 IC2.45 IC2.46 IC2.47 IC2.48 IC2.69 IC2.70 IC2.87 IC2.88 IC2.92 IC2.95 IC2.96 IC2.98 IC2.100 IC2.116 IC2.117 IC2.118 IC2.119 IC2.122 IC2.127 IC2.128 IC2.129 IC2.134 IC2.137 IC2.143 IC8.2 IC8.3 IC8.4 IC14.6 IC14.7 IC14.8 IC14.9 IC14.11 IC14.12 IC14.13 IC14.14 IC15.7 IC16.7 IC17.7 IC17.10 IC21.6 J1.31@15477.48,12376.18 J1.32@16808.19,12376.18 J3.13 J3.14 J4.13 J4.14 J20. J20.S1 J20.S2 J20.S3 J20.S4 JK1.1 JK1.3 JK1.6 JK2.1 JK2.3 JK2.6 JK3.1 JK3.3 JK3.6 MH5.0 MH6.0 MH7.0 MH8.0 MH9.0 MH10.0 MH11.0 MH12.0 MH13.0 PJ1.3 PJ1.5 PJ1.7 PJ1.23 PJ1.25 PJ1.27 PJ2.3 PJ2.5 PJ2.7 PJ2.23 PJ2.25 PJ2.27 R37.2 R37.3 R37.MT1 SW1. SW2. SW3. SW4. SW5. SW6. SW6.1 SW7. SW8. U1.36 U1.40 U2.36 U2.40 U3.36 U3.40 U4.36 U4.40 U6.3
copper on no net: | length 4800.9
  Top Layer 1 w5: 14461.48,10139.04 14516.6,10139.04 14516.48,10139.16 14516.48,10213.49 14515.48,10214.49 v1(14515.48,10269.26) ; v1(14627.6,10108.14) 14628.02,10108.56 14628.02,10118.51 14631.48,10121.98 14631.48,10153.76 ; 14706.99,10717.47 14707.15,10717.31 ; 16015.39,11115.2 16059.7,11115.2 v1(16089.16,11085.73) ; 17659.76,11880.72 17659.88,11880.6 ; 18069.01,11864.01 18070,11865
  Top Layer 1 w8: v1(14516.48,10080.26) 14516.48,10111.36 14516.6,10111.48
  Top Layer 1 w25: 19658.83,13044.99 19658.83,13082.34 19666.48,13089.99
  Unused w5: v1(16209.02,10915.04) 16681.08,10915.04 16758.39,10992.34 16811.83,10992.34 16876.31,10927.86 16943.05,10927.86 17074.44,11059.25 17074.44,11165.94 17148.46,11239.96 17299.3,11239.96 17559.53,11500.2 18561.76,11500.2 18643.15,11418.82 18643.15,11289.62 18643.15,11265.99 18760,11149.14 18760,10960 18860.59,10859.41 18888.96,10859.41 18999.55,10748.82 v1(19085,10748.82)
  Layer 3 w5: 15163.92,9718.23 15167.15,9715 15167.15,9691.03 ; 15194.85,9729.63 15198.62,9725.86 15198.62,9703.04 15199.85,9701.81 15199.85,9689.63 ; 15354.85,9689.63 15356.06,9690.84 15356.06,9720.15 ; 15387.78,9726.7 15387.78,9715.77 15387.7,9715.68 15387.7,9691.78 15389.85,9689.63 ; v1(16089.16,11085.73) 16136.24,11085.73 16209.02,11012.95 v1(16209.02,10915.04) ; 16472.22,9722.42 16475.45,9719.19 16475.45,9695.22 ; 16503.15,9733.82 16506.92,9730.05 16506.92,9707.23 16508.15,9706 16508.15,9693.82 ; 16663.15,9693.82 16664.36,9695.03 16664.36,9724.34 ; 16696.08,9730.89 16696.08,9719.96 16696,9719.87 16696,9695.97 16698.15,9693.82
  Bottom 6+gnd w5: 14453.48,10371.26 14514.48,10310.26 14514.48,10270.26 v1(14515.48,10269.26)
  other v3: 16355.24,10701.2
  other v5: 16283.15,11388.82

## Polygon pours and split planes (outlines as drawn)
GND on Layer 3 "GND_L03_P026" (solid, remove dead copper, pour order 26): 15730,11430 14362.44,11430 14362.44,9618.98 15730,9618.98
GND on Layer 3 "GND_L03_P027" (solid, remove dead copper, pour order 27): 15773.37,11435 17166.63,11435 17166.63,9623.98 15773.37,9623.98
no net on Layer 3 "NONET_L03_P012" (solid, remove dead copper, pour order 12): 16580,10860 16655,10860 16655,10747.12 16640.88,10732.99 16640.88,10718.95 16594.29,10718.95 16580,10733.23 16580,10750
no net on Layer 3 "NONET_L03_P013" (solid, remove dead copper, pour order 13): 16810,10940 16830.1,10919.9 16830.1,10764.74 16798.36,10732.99 16798.36,10710 16758.8,10711.29 16766.45,10741.02 16766.45,10896.45
V_USB on Layer 3 "NONET_L01_P-001" (solid, remove dead copper, pour order 63): 19930,12820 20409.02,12820 20409.02,12940 20025.71,12942.22 19753.78,13244.04 19700.92,13244.04 19700.92,12917.7 19799.74,12920.77
no net on Layer 3 "NONET_L03_P014" (solid, remove dead copper, pour order 14): 16858.98,10405 16908.98,10405 16908.98,10359.12 16908.22,10358.37 16908.22,10165.76 16908.98,10165 16843.98,10165 16843.98,10357.12 16861.09,10374.23 16858.98,10376.35
no net on Layer 3 "NONET_L03_P015" (solid, remove dead copper, pour order 15): 16672.11,10390.53 16670,10405 16720,10405 16720,10359.12 16719.24,10358.37 16719.24,10165.76 16720,10165 16655,10165 16655,10357.12 16672.11,10374.23 16670,10376.35
no net on Layer 3 "NONET_L03_P018" (solid, remove dead copper, pour order 18): 15363.81,10386.34 15361.7,10400.81 15411.7,10400.81 15411.7,10354.93 15410.94,10354.18 15410.94,10161.57 15411.7,10160.81 15346.7,10160.81 15346.7,10352.93 15363.81,10370.04 15361.7,10372.16
no net on Layer 3 "NONET_L03_P019" (solid, remove dead copper, pour order 19): 15550.68,10400.81 15600.68,10400.81 15600.68,10354.93 15599.92,10354.18 15599.92,10161.57 15600.68,10160.81 15535.68,10160.81 15535.68,10352.93 15552.79,10370.04 15550.68,10372.16
GND on Top Layer 1 "NONET_L01_P-001" (solid, remove dead copper, pour order 22): 15699.58,9609.84 14332.49,9609.84 14332.49,11422.82 15694.58,11424.84 15694.58,9614.84
GND on Top Layer 1 "NONET_L01_P-001" (solid, remove dead copper, pour order 23): 15773.33,11421.78 17177.75,11423.86 17177.75,9611.78 15773.33,9611.78
NetD3_1 on Top Layer 1 "NETD3_1_L01_P057" (solid, remove dead copper, pour order 57): 19338.3,12940 19419.81,12940 19419.81,13040 19325.8,13040
+V_SYS on Top Layer 1 "+V_SYS_L01_P069" (solid, pour order 69): 20345.91,13045.28 20350.63,13050 20350.63,13125.04 20335.67,13140 20240.63,13140 20150.63,13050 20020.63,13050 19920.64,13149.99 19830.44,13149.99 19830.44,13059.81 19758.25,12987.62 19758.25,12879.74 20180.37,12879.74 20250.63,12950 20250.63,13020.47 20275.43,13045.28
V_BAT on Top Layer 1 "V_BAT_L01_P070" (solid, remove dead copper, pour order 70): 20030.63,13070 20140.63,13070 20230.63,13160 20380.21,13160 20401.41,13138.8 20384.02,13121.4 20384.02,12976.61 20410.63,12950 20410.63,12920 20540.63,12850 20472.01,12987.78 20540.37,13090 20540.63,13200 20500.63,13240 20050.63,13240 20010.63,13200 20010.63,13090
NetC92_2 on Top Layer 1 "NONET_L01_P-001" (solid, remove dead copper, pour order 65): 20259.8,12872.67 20135.41,12804.67 20279.8,12670 20323.7,12667.77 20323.24,12693.14 20316.1,12696.94 20279.8,12697.24 20279.8,12812.03 20279.8,12830.11 20319.8,12830.11 20319.8,13030.11 20269.8,13030.11 20259.8,13020.11
+V_SYS on Top Layer 1 "NONET_L01_P-001" (solid, remove dead copper, pour order 54): 19922.36,12999.99 19935.93,13013.56 19935.93,13083.88 19869.81,13149.99 19674.81,13149.99 19674.81,12805.87 19795.87,12805.87 19890,12900 19890,12999.99
+V_SYS on Top Layer 1 "+V_SYS_L01_P055" (solid, remove dead copper, pour order 55): 19545.6,12647.54 19701.22,12653.11 19701.22,12878.78 19675.6,12904.4 19585.6,12904.4 19565.6,12884.4 19565.6,12704.4 19545.6,12684.4
+5V on Top Layer 1 "+5V_L01_P056" (solid, remove dead copper, pour order 56): 19195.6,12714.21 19235.4,12674.4 19375.6,12674.4 19375.6,12884.4 19365.6,12894.4 19305.6,12894.4 19265.6,12934.4 19265.6,13119.99 19195.6,13119.99
GND on Top Layer 1 "GND_L01_P058" (solid, remove dead copper, pour order 58): 19399.81,12719.99 19435.01,12762.85 19435.01,12884.4 19545.6,12884.4 19545.6,12724.4 19484.02,12639.99 19428.84,12639.99 19383.74,12700.43
+5V on Layer 2 "+5V_L02_P030" (solid, pour order 30): 13180,13250 13180,8080 21575,8080 21580,8085 21575,8090 21575,13245
+MCU on Layer 2 "NONET_L01_P-001" (solid, remove dead copper, pour order 25): 15728.15,11423.1 14363.15,11423.1 14363.15,9612.08 15728.15,9612.08
+MCU on Layer 2 "NONET_L01_P-001" (solid, remove dead copper, pour order 24): 15772.02,11424.22 17167.85,11424.22 17167.85,9613.2 15772.02,9613.2
GND on Layer 2 "NONET_L01_P-001" (solid, remove dead copper, pour order 64): 20259.65,12560 20259.65,13240 21479.65,13240 21479.65,12560
GND on Bottom 6+gnd "GND_L07_P017" (solid, remove dead copper, pour order 17): 15715.46,11423.92 14347.9,11423.92 14347.9,9612.9 15715.46,9612.9
GND on Bottom 6+gnd "GND_L07_P071" (solid, remove dead copper, pour order 71): 13175,13240 13180,13235 13180,8080 21575,8080 21575,13245
GND on Bottom 6+gnd "GND_L07_P029" (solid, remove dead copper, pour order 29): 15761.3,11423.09 17154.56,11423.09 17154.56,9612.06 15761.3,9612.06
+5V_Out on Bottom 6+gnd "NONET_L02_P-001" (solid, remove dead copper, pour order 16): 15765,12140 15867.64,12140 15893.35,12165.71 15893.35,12203.35 15945,12255 15945,12515 15940,12520 15765,12520 15750,12505 15750,12150
GND on Layer 5_gnd "GND_L06_P033" (solid, pour order 33): 13180,13250 13170,13240 13170,8075 21570,8075 21575,8080 21575,13245

## Silkscreen, mask and mechanical layers (free items; w line width, h text height)
Top Overlay:
  circle w15: c20157.48,8269.72 r125.02
  circle w15: c17378,8270 r125.02
  circle w15: c15123,8269.72 r125.02
  circle w15: c13900.39,12783.41 r125.02
  circle w15: c15120.47,12413.03 r125.02
  circle w15: c17377.7,12413.03 r125.02
  circle w15: c20157.48,12215.72 r125.02
  circle w15: c15285,11684.09 r125.02
  circle w15: c19740.92,10698.88 r125.02
  circle w15: c19751,9403 r125.02
  circle w15: c17309.34,9413.61 r125.02
  circle w15: c15313.19,9424.09 r125.02
  circle w15: c18740.16,12480.32 r88.03
  circle w15: c19690,12480 r88.03
  circle w15: c19200,12480 r88.03
  lines w5: 19700.2,12639.13 19700.2,12780.86 ; 20110.04,12689.13 20110.04,12830.87 ; 20968.43,12886.93 20934.65,12835 20934.65,12735 20874.65,12670 20874.65,12595 21229.65,12595 21229.65,12775 21229.65,12835 21179.61,12886.93 ; 14322.52,11847.2 14345.64,11911.04 14407.52,11942.2 14473.26,11911.04 14497.48,11850.39 14472.52,11787.2 14412.73,11762.42 14347.52,11787.2 14322.52,11847.2 ; 14480,9485 14505,9425 14570.21,9400.22 14630,9425 14654.96,9488.19 14630.74,9548.84 14565,9580 14503.12,9548.84 14480,9485 ; 16966.32,12268.7 16989.44,12332.54 17051.32,12363.7 17117.06,12332.54 17141.29,12271.89 17116.32,12208.7 17056.53,12183.92 16991.32,12208.7 16966.32,12268.7 ; 17754.08,9617.31 17777.2,9681.15 17839.08,9712.31 17904.82,9681.15 17929.05,9620.5 17904.08,9557.31 17844.29,9532.53 17779.08,9557.31 17754.08,9617.31 ; 17754.08,11705.8 17777.2,11769.63 17839.08,11800.8 17904.82,11769.63 17929.05,11708.99 17904.08,11645.8 17844.29,11621.01 17779.08,11645.8 17754.08,11705.8 ; 18386.32,12268.7 18409.44,12332.54 18471.32,12363.7 18537.06,12332.54 18561.29,12271.89 18536.32,12208.7 18476.53,12183.92 18411.32,12208.7 18386.32,12268.7
  lines w7.87: 15222.5,11575.82 15347.51,11792.36 ; 15222.5,11792.36 15347.51,11575.82 ; 15250.69,9315.82 15375.7,9532.36 ; 15250.69,9532.36 15375.7,9315.82 ; 17246.83,9305.34 17371.84,9521.88 ; 17246.83,9521.88 17371.84,9305.34 ; 19678.41,10590.61 19803.43,10807.14 ; 19678.41,10807.14 19803.43,10590.61 ; 19688.49,9294.73 19813.51,9511.27 ; 19688.49,9511.27 19813.51,9294.73
  lines w10: 14013.78,9913.19 14013.78,9982.6 ; 15983.15,8708.82 15983.15,8738.82 16153.15,8738.82 ; 16268.15,8713.82 16268.15,8738.82 16213.15,8738.82 ; 17585,11958.82 17655,11958.82 17655,11998.82 17763.15,11998.82 18069.01,11998.82 ; 17630,12038.82 17660,12038.82 ; 17660,12058.82 17660,12038.82 ; 17700,12038.82 17660,12038.82 ; 17715,11998.82 17715,12058.82 ; 17732.15,12037.15 17780,12037.15 17825,12037.15 ; 17780,12038.82 17780,12058.82 ; 17840,11998.82 17840,12058.82 ; 17855,12037.15 17895,12037.15 17935,12037.15 ; 17950,12003.82 17950,12058.82 ; 17965,12037.15 18015,12037.15 ; 18015,12038.82 18015,12058.82 ; 18070,11998.82 18070,12053.82 ; 16153.15,8738.82 16213.15,8738.82 ; 16153.15,8738.82 16153.15,8713.82 16153.15,8738.82 ; 16213.15,8738.82 16213.15,8713.82 16213.15,8738.82 ; 17895,12038.82 17895,12058.82 17895,12038.82
  lines w15: 16038.15,8588.82 16038.15,8573.82 16098.15,8573.82 16098.15,8588.82
  text "SWD" at 17615,12008.82 h24 r90
  text "ADC" at 17570,11920 h24 r90
  text "SPI" at 16088.15,8753.82 h24
  text "I2C" at 16048.15,8543.82 h24